# EAGLE board LEDnecklace (EAGLE 7.5.0)
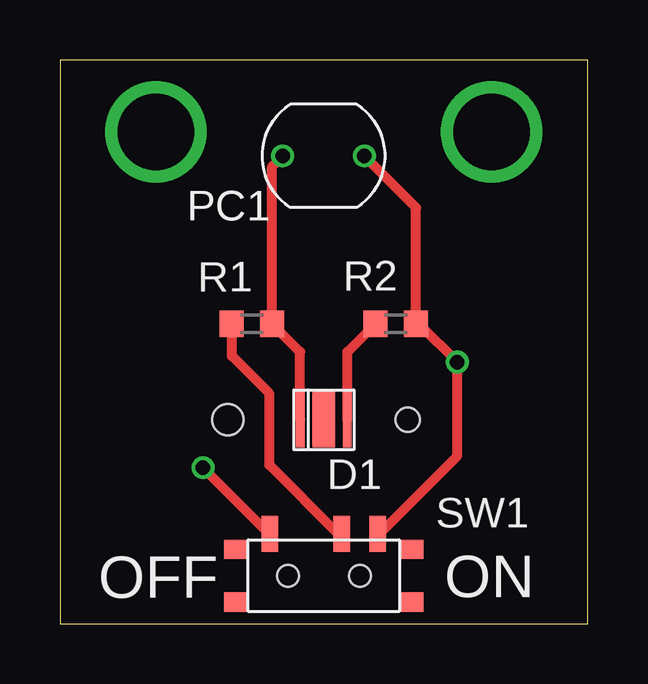
[diagram p0: board, top side]
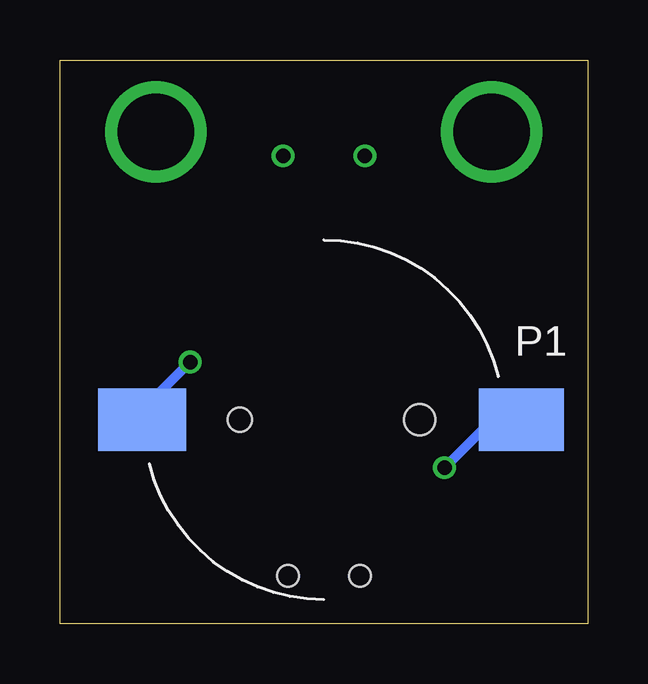
[diagram p1: board, bottom side, seen from below]

Size 22 x 23.5 mm. Coordinates in mm from the lower left corner, seen from the top.
Outline: 0,0 22,0 22,23.5 0,23.5 0,0
Copper layers (1*16): Top 0.0356mm / dielectric 1.5011mm / Bottom 0.0356mm
Design rules "LaenPCBOrder": minimum track width 6mil, minimum drill 13mil, track to track 6mil, track to pad 6mil, pad to pad 6mil, via to via 6mil, smd to smd 6mil, copper to edge 15mil, drill to drill 6mil, minimum pad ring 7mil, minimum via ring 7mil, stop-mask expansion 3mil, vias tented up to drill 0mil, thermal gap 10mil

## Footprints (pad centres in the part's own frame; a part is rotated, then mirrored left to right if it is on the bottom)
XLAMP_XBD = smd 0.34 x 2.3: AD -0.98,0; CD 0.98,0 | smd 0.92 x 2.3: NC 0,0
BC501SM_BATT_HOLD = smd 3.66 x 2.6: GND -7.57,0 | smd 3.54 x 2.6: VCC 8.23,0 | hole 1: -3.5,0 | hole 1.3: 4,0
PHOTOCELL_CERAMIC = drill 0.6: 1 0,1.7; 2 0,-1.7
R0603 = smd 1 x 1.1: 1 -0.85,0; 2 0.85,0
PCM12SMTR = smd 0.7 x 1.5: 1 -2.25,1.75; 2 0.75,1.75; 3 2.25,1.75 | smd 1 x 0.8: 4 -3.65,1.1; 5 -3.65,-1.1; 6 3.65,1.1; 7 3.65,-1.1 | hole 0.9: -1.5,0; 1.5,0

## Placement (x,y rotation side)
D1  XLAMP_XBD  [XLAMP_XBD]  11,8.5 0 top
P1  BC501SM_BATT_HOLD  [BC501SM_BATT_HOLD]  11,8.5 0 bottom
PC1  [PHOTOCELL_CERAMIC]  10.99,19.5 90 top
R1  [R0603]  8,12.5 180 top
R2  [R0603]  14,12.5 180 top
SW1  PCM12SMTR  [PCM12SMTR]  11,2 0 top

## Library data of the parts
D1 P1 PC1 SW1 = freddyLibr
R1 R2 = resistor

## Nets
N$1: R1.2 SW1.2
N$2: P1.GND PC1.2 R2.1 SW1.3
N$3: P1.VCC SW1.1
N$4: D1.AD PC1.1 R1.1
N$5: D1.CD R2.2

## Tracks (layer width: path | path; a pad name or v marks a point on that pad's centre or on a via)
N$1
  Top 0.406: SW1.2 11.59,3.75 8.73,6.61 8.73,9.59 7.17,11.15 7.17,12.48 R1.2
N$2  (via drill 0.6)
  Top 0.406: PC1.2 14.85,17.34 R2.1 14.97,12.5 v16.57,10.9 16.57,7 13.32,3.75 SW1.3
  Bottom 0.406: v16.57,10.9 18.24,9.23 18.24,8.83 P1.GND
N$3  (via drill 0.6)
  Top 0.406: SW1.1 8.71,3.75 v5.96,6.5
  Bottom 0.406: v5.96,6.5 4.01,8.45 2.82,8.45 P1.VCC
N$4
  Top 0.406: D1.AD 10.02,11.33 R1.1 8.85,19.06 PC1.1
N$5
  Top 0.406: D1.CD 11.98,11.33 R2.2
N$6  (via drill 3.2)
  other vias: 4,20.5
N$7  (via drill 3.2)
  other vias: 18,20.5

## Text on the board
tPlace: ON | OFF